# Altium PCB RHT.PcbDoc
Units mm, origin at the board's own origin, x right, y up, seen from the top; angles counter-clockwise.
Board outline 60 x 60 mm, 2 copper layers (Top Layer, Bottom Layer), stack 1.635 mm thick; 64 components, 55 nets, 248 pads, 33 vias.
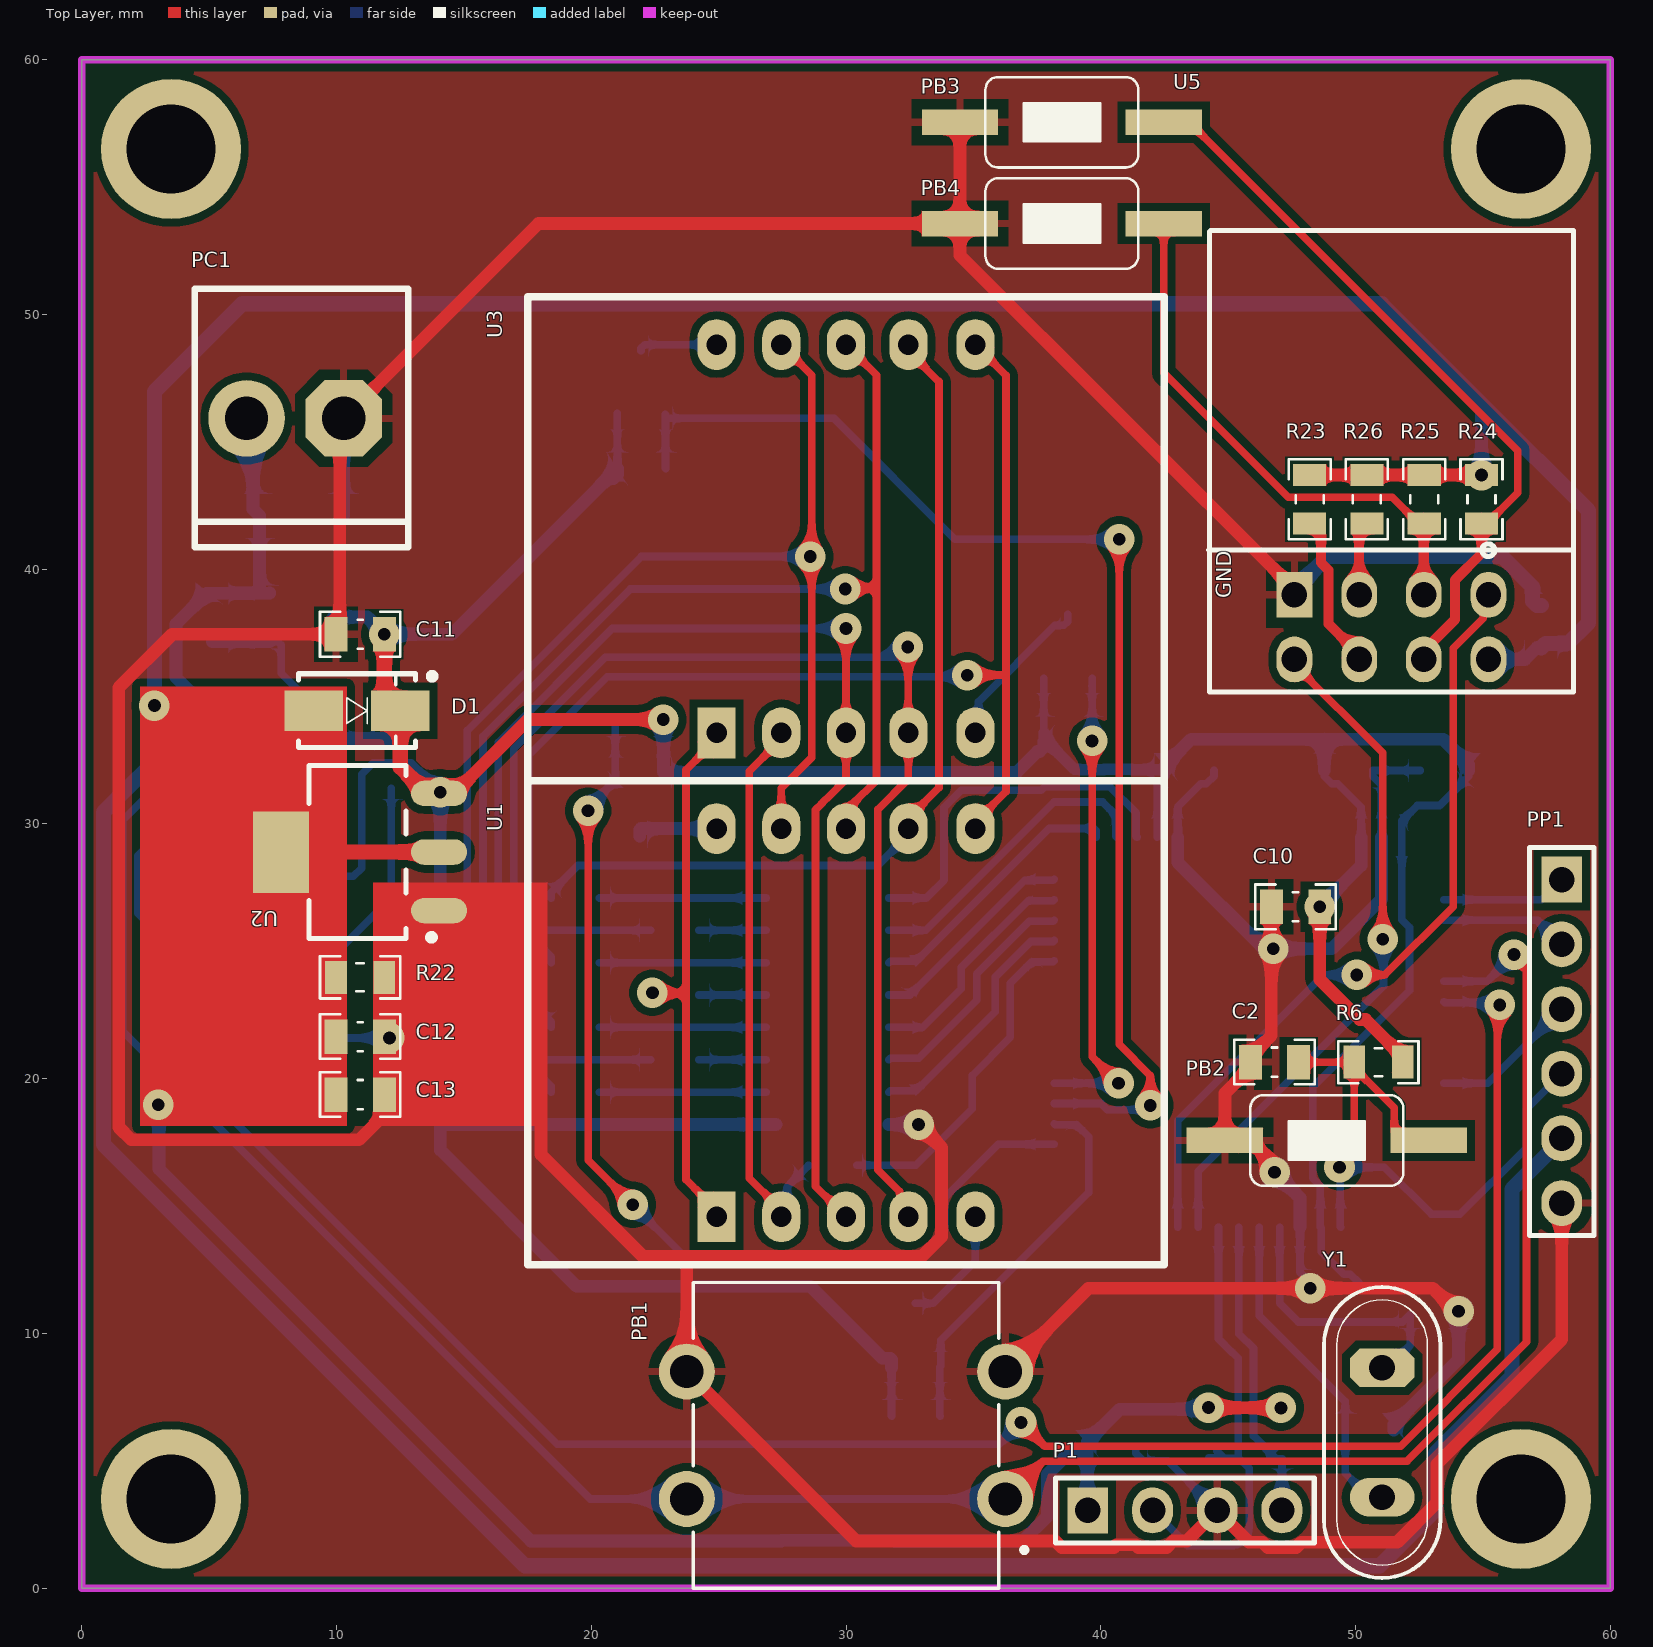
[diagram p0: Top Layer view]
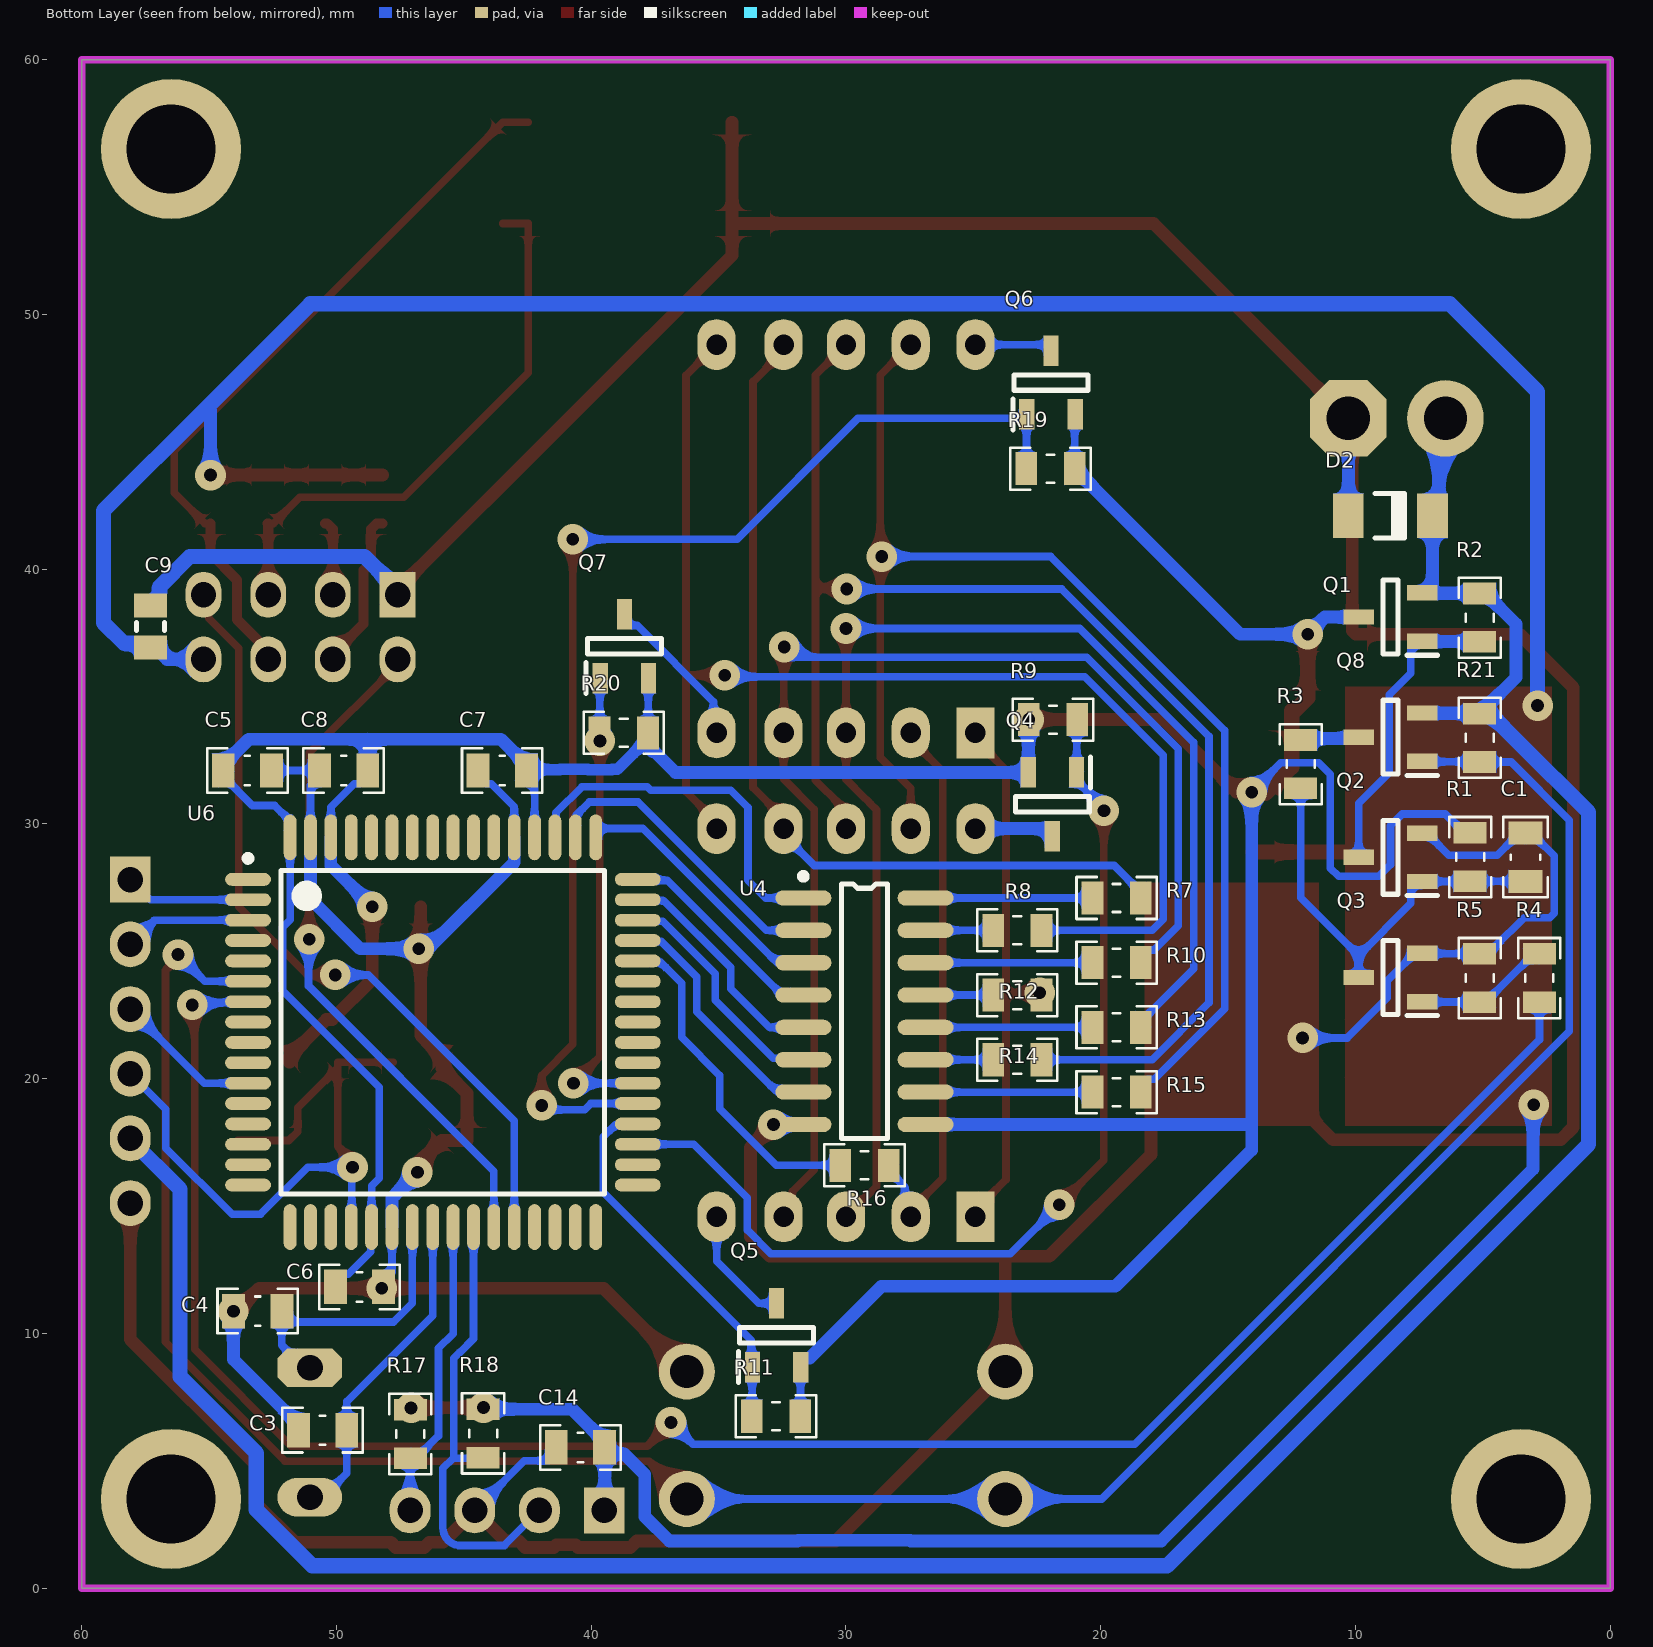
[diagram p1: Bottom Layer view, seen from below]

## Layer stack, top to bottom
Top Solder: solder mask 0.0102, Solder Resist, Dk 3.5
Top Layer: signal copper 0.0175
Dielectric 1: dielectric 1.6, FR-4, Dk 4.8
Bottom Layer: signal copper 0.0175
Bottom Solder: solder mask 0.0102, Solder Resist, Dk 3.5

## Board outline
0,0 60,0 60,60 0,60

## Design rules (kind name [scope] priority, off if disabled: settings)
Clearance [All] p1: gap=0.3 ignorepadtopadclearanceinfootprint=FALSE except(0: Arc-Hole Track-Hole SMDPad-Hole THPad-Hole Via-Hole Fill-Hole Poly-Hole Region-Hole Text-Hole)
ComponentClearance [All] p1: gap=0 collisioncheckmode=3 verticalgap=0.254 showdistances=FALSE
PolygonConnect [All] p1: thpad.connectstyle=Relief thpad.reliefconductorwidth=0.3 thpad.reliefentries=4 thpad.polygonreliefangle="90 Angle" thpad.airgapwidth=0.4 smdpad.connectstyle=Relief smdpad.reliefconductorwidth=0.3 smdpad.reliefentries=4 smdpad.polygonreliefangle="90 Angle" smdpad.airgapwidth=0.4 via.connectstyle=Direct via.reliefconductorwidth=0.254 via.reliefentries=4 via.polygonreliefangle="90 Angle" via.airgapwidth=0.254
RoomDefinition pripherals [InComponentClass('pripherals')] p1 off: confinementstyle=ConfineIn formatcopy=TRUE lockcomponents=FALSE outline 75.3,3.95 107.4,3.95 107.4,32.144 75.3,32.144
RoomDefinition micro [InComponentClass('micro')] p2 off: confinementstyle=ConfineIn formatcopy=TRUE lockcomponents=FALSE outline 74.964,39.776 107.925,39.776 107.925,60.35 74.964,60.35
RoutingVias [All] p1: holewidth=0.5 width=1 viastyle="Through Hole" minholewidth=0.5 minwidth=1 maxholewidth=1 maxwidth=1.5
SolderMaskExpansion [All] p1: expansion=0.102 istentingtop=FALSE
Width [All] p1: maxlimit=1 minlimit=0.3 preferedwidth=0.4
29 further rules are at their usual default settings.

## Classes and differential pairs
component class pripherals: C9 C11 C12 C13 C14 D1 P1 PB3 PB4 Q4 Q5 Q6 Q7 R7 R8 R9 R10 R11 R12 R13 R14 R15 R16 R17 R18 R19 R20 R22 R23 R24 R25 R26 U1 U2 U3 U4 U5
component class micro: C1 C2 C3 C4 C5 C6 C7 C8 C10 D2 PB1 PB2 PC1 PP1 Q1 Q2 Q3 Q8 R1 R2 R3 R4 R5 R6 R21 U6 Y1

## Components (designator, comment, footprint, x,y, rotation, side; value= is the part's Value field where it differs from the comment)
C1 "cap 4.7uF" CAP0805 3.325,28.7 r270 bottom value=4.7uF
C2 "cap 100nF" CAP0805 46.823,20.65 r0 top value=100nF
C3 "cap 22pF" CAP0805 50.55,6.2 r180 bottom value=22pF
C4 "cap 22pF" CAP0805 53.1,10.875 r180 bottom value=22pF
C5 "cap 100nF" CAP0805 53.5,32.1 r0 bottom value=100nF
C6 "cap 100nF" CAP0805 49.1,11.825 r0 bottom value=100nF
C7 "cap 100nF" CAP0805 43.5,32.1 r180 bottom value=100nF
C8 "cap 100nF" CAP0805 49.725,32.1 r180 bottom value=100nF
C9 "cap 100nF" "Cap 805" 57.3,38.575 r270 bottom value=100nF
C10 "cap 10uF" CAP0805 47.65,26.75 r180 top value=10uF
C11 "cap 10uF" CAP0805 10.925,37.45 r180 top value=10uF
C12 "cap 10uF" CAP0805 10.925,21.65 r0 top value=10uF
C13 "cap 100nF" CAP0805 10.925,19.375 r180 top value=100nF
C14 "cap 1uF" CAP0805 40.425,5.525 r0 bottom value=1uF
D1 "uf4007" DIOM4629X24N 10.801,34.45 r0 top
D2 "5.1V" "Diode 1n4148 SMD" 10.275,42.1 r180 bottom
P1 "Header 4" HDR1X4 39.495,3.05 r0 top locked
PB1 "Push-Button-tall" tact-12mm 30,6 r180 top locked
PB2 "Push-Button-tall" tack-sw-3x5x6 48.875,17.575 r0 top
PB3 "Push-Button-tall" tack-sw-3x5x6 38.475,57.55 r0 top
PB4 "Push-Button-tall" tack-sw-3x5x6 38.475,53.575 r0 top
PC1 "Power Connector" "My_ Power_Connector" 14.086,40.845 r180 top
PP1 "Header 6" HDR1X6 58.1,27.815 r270 top
Q1 "NDS356AP" soT95p280x130-3n 8.371,38.125 r0 bottom
Q2 "2N2222A" soT95p280x130-3n 8.371,28.692 r0 bottom
Q3 "2N2222A" soT95p280x130-3n 8.371,23.975 r0 bottom
Q4 "NDS356AP" soT95p280x130-3n 21.9,31.029 r270 bottom
Q5 "NDS356AP" soT95p280x130-3n 32.725,9.675 r90 bottom
Q6 "NDS356AP" soT95p280x130-3n 21.95,47.075 r90 bottom
Q7 "NDS356AP" soT95p280x130-3n 38.7,36.725 r90 bottom
Q8 "NDS356AP" soT95p280x130-3n 8.371,33.408 r0 bottom
R1 "100K" RES0805 5.5,28.7 r270 bottom
R2 "Res 100K" RES0805 5.125,38.1 r270 bottom value=100K
R3 "100K" RES0805 12.15,32.35 r270 bottom
R4 "1K" RES0805 2.775,23.95 r90 bottom
R5 "1K" RES0805 5.125,23.95 r270 bottom
R6 "Res 1K" RES0805 50.902,20.65 r180 top value=1K
R7 "330" RES0805 19.375,27.095 r180 bottom
R8 "330" RES0805 23.275,25.825 r180 bottom
R9 "10K" RES0805 21.875,34.1 r180 bottom
R10 "330" RES0805 19.375,24.555 r180 bottom
R11 "10K" RES0805 32.75,6.75 r0 bottom
R12 "330" RES0805 23.275,23.285 r180 bottom
R13 "330" RES0805 19.375,22.015 r180 bottom
R14 "330" RES0805 23.275,20.745 r180 bottom
R15 "330" RES0805 19.375,19.475 r180 bottom
R16 "330" RES0805 29.275,16.6 r180 bottom
R17 "Res 4.7K" RES0805 47.1,6.05 r270 bottom value=4.7K
R18 "Res 4.7K" RES0805 44.25,6.075 r270 bottom value=4.7K
R19 "10K" RES0805 21.975,43.95 r0 bottom
R20 "10K" RES0805 38.725,33.575 r0 bottom
R21 "Res 100K" RES0805 5.125,33.383 r270 bottom value=100K
R22 "1K" RES0805 10.925,23.975 r180 top
R23 "Res 1K" RES0805 48.2,42.75 r270 top value=1K
R24 "Res 1K" RES0805 54.95,42.75 r270 top value=1K
R25 "Res 1K" RES0805 52.7,42.75 r90 top value=1K
R26 "Res 1K" RES0805 50.45,42.75 r90 top value=1K
U1 "7seg_CA" 7SEG 30,22.2 r0 top locked
U2 "AMS1117-3.3" SOT223 10.825,28.9 r180 top
U3 "7seg_CA" 7SEG 30,41.2 r0 top locked
U4 "ULN2003A" SO16_N 29.275,22.65 r180 bottom
U5 "Header4*2Pin Female" ESP8266-01/ESP-01 51.415,39 r90 top locked
U6 "ATmega128A" TQFP64_N 45.825,21.825 r180 bottom locked
Y1 "8MHz" My_Crystal 51.05,6.11 r270 top locked

## Footprints (in the part's own frame and the unit in brackets; to place one, negate y for a bottom-side part, rotate by r counter-clockwise, add the part's x,y. Pads: shape width x height; smd on the part's side, far side on the other; paste and mask are expansions set on the pad)
7SEG [mm]
  rect 1.5x2 hole 0.8 mask+0.05: 1(-5.08,-7.62)
  oval 1.5x2 hole 0.8 mask+0.05: 2(-2.54,-7.62) 3(0,-7.62) 4(2.45,-7.62) 5(5.08,-7.62) 6(5.08,7.62) 7(2.45,7.62) 8(0,7.62) 9(-2.54,7.62) 10(-5.08,7.62)
  silkscreen extent -12.5,-9.5 12.5,9.5, body extent -12.6,-9.5 12.6,9.5, height 9.1
CAP0805 [mm] "Chip Capacitor, 2-Leads, Body 2/00x1/25mm, IPC Medium Density DESIGNER:ABBAS BASEREH"
  rect 0.9x1.35 smd: 1(-0.95,0) 2(0.95,0)
  silkscreen extent -1.58,-0.87 1.58,0.87, body extent -1.02,-0.65 1.02,0.65, height 0.5
"Cap 805" [mm]
  rect 0.95x1.3 smd: 1(0,0) 2(1.65,0)
  silkscreen extent 0.67,-0.55 0.97,0.55, body extent -0.19,-0.64 1.84,0.63, height 0.65
"Diode 1n4148 SMD" [mm] "Mini MELF SOD-80"
  rect 1.2x1.75 smd: 1(0,0) 2(3.3,0)
  silkscreen extent 1.04,-0.88 2.22,0.87, body extent -0.13,-0.75 3.37,0.75, height 1.55
DIOM4629X24N [mm] "Molded Diode, 2-Leads, Body 4/60x2/90mm, IPC Medium Density-Design:Abbas Basereh"
  rect 2.3x1.6 smd: 1(-1.7,0) 2(1.7,0)
  silkscreen extent -2.3,-1.45 3.08,1.47, body extent -2.5,-1.22 2.5,1.48, height 2.2
ESP8266-01/ESP-01 [mm]
  oval 1.8x1.4 hole 1: 1(0,-3.81) 2(0,-1.27) 3(0,1.27) 5(-2.54,3.81) 6(-2.54,1.27) 7(-2.54,-1.27) 8(-2.54,-3.81)
  rect 1.8x1.4 hole 1: 4(0,3.81)
  silkscreen extent -3.81,-7.15 14.3,7.17, body extent -4.02,-7.15 20.57,7.5, height 10
HDR1X4 [mm] "Connector; Header; 4 Position"
  rect 1.6x1.8 hole 1: 1(0,0)
  oval 1.6x1.8 hole 1: 2(2.54,0) 3(5.08,0) 4(7.62,0)
  silkscreen extent -1.27,-1.27 8.89,1.27
HDR1X6 [mm] "Connector; Header; 6 Position"
  rect 1.8x1.6 hole 1: 1(0,0)
  oval 1.8x1.6 hole 1: 2(2.54,0) 3(5.08,0) 4(7.62,0) 5(10.16,0) 6(12.7,0)
  silkscreen extent -1.27,-1.27 13.97,1.27
"My_ Power_Connector" [mm]
  oct 3x3 hole 1.7: 1(3.81,-5.08)
  round 3 hole 1.7: 2(7.62,-5.08)
  silkscreen extent 1.27,-10.17 9.65,-0.01
My_Crystal [mil]
  oct 60x100 hole 40: 1(-100,0)
  oval 60x100 hole 40: 2(100,0)
  silkscreen extent -225,-90 225,90
RES0805 [mm] "Chip Resistor, 2-Leads, Body 2/00x1/25mm, IPC Medium Density DESIGNER:ABBAS BASEREH"
  rect 0.85x1.3 smd: 1(-0.95,0) 2(0.95,0)
  silkscreen extent -1.58,-0.82 1.58,0.82, body extent -1.02,-0.65 1.02,0.65, height 0.5
SO16_N [mm] "16-Pin Small Outline Integrated Circuit 1.27 mm Pitch, IPC Medium Density - DESIGNER ABBAS BASEREH"
  oval 2.2x0.6 smd: 1(-2.4,4.445) 2(-2.4,3.175) 3(-2.4,1.905) 4(-2.4,0.635) 5(-2.4,-0.635) 6(-2.4,-1.905) 7(-2.4,-3.175) 8(-2.4,-4.445) 9(2.4,-4.445) 10(2.4,-3.175) 11(2.4,-1.905) 12(2.4,-0.635) 13(2.4,0.635) 14(2.4,1.905) 15(2.4,3.175) 16(2.4,4.445)
  silkscreen extent -2.53,-5 0.9,5.42, body extent -3,-4.97 3,4.96, height 1.62
soT95p280x130-3n [mm]
  rect 1.2x0.6 smd: 1(-0.996,0.95) 2(-0.996,-0.95) 3(1.504,0)
  silkscreen extent -1.6,-1.45 0.55,1.5, body extent -1.15,-1.4 1.65,1.5, height 1.3
SOT223 [mm] "SOT223, 4-Leads, Body 6.5x3.5mm, Pitch 2.30mm-Designer Abbas Basereh"
  oval 2.2x1 smd: 1(-3.2,2.3) 2(-3.2,0) 3(-3.2,-2.3)
  rect 2.2x3.2 smd: 4(3,0)
  Top Layer pour cut-out: -1.7,3.556 1.7,3.556 1.7,-3.556 -1.7,-3.556
  silkscreen extent -3.03,-3.4 1.9,3.47, body extent -3.5,-3.25 3.5,3.25, height 1.7
tack-sw-3x5x6 [mm]
  rect 3x1 smd mask+0.05: 1(-4,0) 2(4,0)
  silkscreen extent -3,-1.78 3,1.78, body extent -4,-1.75 4,1.75, height 4.3
tact-12mm [mm]
  round 2.2 hole 1.3: 1(-6.25,2.5) 1(6.25,2.5) 2(-6.25,-2.5) 2(6.25,-2.5)
  silkscreen extent -7.1,-6 6,6, body extent -6.9,-5.98 7.1,6.03, height 8.35
TQFP64_N [mm] "Thin QFP, 64-Leads, Body 14x14mm, Pitch 0.8mm, IPC Medium Density"
  oval 1.8x0.5 smd: 1(-7.65,6) 2(-7.65,5.2) 3(-7.65,4.4) 4(-7.65,3.6) 5(-7.65,2.8) 6(-7.65,2) 7(-7.65,1.2) 8(-7.65,0.4) 9(-7.65,-0.4) 10(-7.65,-1.2) 11(-7.65,-2) 12(-7.65,-2.8) 13(-7.65,-3.6) 14(-7.65,-4.4) 15(-7.65,-5.2) 16(-7.65,-6) 33(7.65,-6) 34(7.65,-5.2) 35(7.65,-4.4) 36(7.65,-3.6) 37(7.65,-2.8) 38(7.65,-2) 39(7.65,-1.2) 40(7.65,-0.4) 41(7.65,0.4) 42(7.65,1.2) 43(7.65,2) 44(7.65,2.8) 45(7.65,3.6) 46(7.65,4.4) 47(7.65,5.2) 48(7.65,6)
  oval 0.5x1.8 smd: 17(-6,-7.65) 18(-5.2,-7.65) 19(-4.4,-7.65) 20(-3.6,-7.65) 21(-2.8,-7.65) 22(-2,-7.65) 23(-1.2,-7.65) 24(-0.4,-7.65) 25(0.4,-7.65) 26(1.2,-7.65) 27(2,-7.65) 28(2.8,-7.65) 29(3.6,-7.65) 30(4.4,-7.65) 31(5.2,-7.65) 32(6,-7.65) 49(6,7.65) 50(5.2,7.65) 51(4.4,7.65) 52(3.6,7.65) 53(2.8,7.65) 54(2,7.65) 55(1.2,7.65) 56(0.4,7.65) 57(-0.4,7.65) 58(-1.2,7.65) 59(-2,7.65) 60(-2.8,7.65) 61(-3.6,7.65) 62(-4.4,7.65) 63(-5.2,7.65) 64(-6,7.65)
  silkscreen extent -7.78,-6.35 6.35,6.95, body extent -8,-8 8,8, height 1.5

## Part data
C1 C2 C3 C4 C5 C6 C7 C8 C13 C14: library part "Cap ceramic", "CAP seramic"
C9: library part Cap, "Capacitor", LatestRevisionDate=17-Jul-2002, LatestRevisionNote="Re-released for DXP Platform.", PackageDescription="Radial Cap, Thru-Hole; 2 Leads; 0.3 in Pin Spacing", PackageReference=RAD-0.3, Published=8-Jun-2000, Publisher="Altium Limited"
C10 C11 C12: library part "Cap Pol1", "CAP seramic", LatestRevisionDate=17-Jul-2002, LatestRevisionNote="Re-released for DXP Platform.", PackageDescription="Polarized Capacitor (Radial); 2 Leads", PackageReference=RB7.6-15, Published=8-Jun-2000, Publisher="Altium Limited"
D1: library part "1n4007 SMD M7", "Standard Rectifiers", Manufacturer="DC COMPONENTS", Data=16-12-2016, Designer="Abbas Basereh", Link=http://www.tme.eu/en/details/m7/smd-universal-diodes/dc-components/, Part. No=M7
D2: library part "D Zener", "Zener Diode 5.1v", LatestRevisionDate=17-Jul-2002, LatestRevisionNote="Re-released for DXP Platform.", PackageDescription="Diode, Thru-Hole; 2 Leads; 0.7 in Pin Spacing", PackageReference=DIODE-0.7, Published=8-Jun-2000, Publisher="Altium Limited"
P1: "Header, 4-Pin", LatestRevisionDate=17-Jul-2002, LatestRevisionNote="Re-released for DXP Platform.", Publisher="Altium Limited"
PC1: "white Power Connector"
PP1: "Header, 6-Pin , female", LatestRevisionDate=17-Jul-2002, LatestRevisionNote="Re-released for DXP Platform.", Publisher="Altium Limited"
Q1 Q4 Q5 Q6 Q7 Q8: library part MOSFET-P, "P-Channel MOSFET SOT23", LatestRevisionDate=17-Jul-2002, LatestRevisionNote="Re-released for DXP Platform.", PackageDescription="TO, Flat Index; 3 In-Line, Axial Leads; Body Dia. 4.6mm; Lead Dia. 0.5 mm (max)", PackageReference=E3, PackageVersion=1995/1996, Published=8-Jun-2000, Publisher="Altium Limited"
Q2 Q3: "Transistor BJT NPN SMD", Manufacturer_Name="Foshan Blue Rocket Elec", Datasheet Link=https://datasheet.lcsc.com/szlcsc/1901291437_Foshan-Blue-Rocket-Elec-2N2222A_C358533.pdf, Height=4.7mm, Manufacturer_Part_Number=2N2222A
R1 R3 R4 R5 R7 R8 R9 R10 R11 R12 R13 R14 R15 R16 R19 R20: library part Resistor, "RES SMD 0603", Part Number=RCS0805100KFKEA
R2 R6 R17 R18 R21 R22 R23 R24 R25 R26: library part Res1, "Resistor", LatestRevisionDate=17-Jul-2002, LatestRevisionNote="Re-released for DXP Platform.", PackageDescription="Axial Device, Thru-Hole; 2 Leads; 0.3 in Pin Spacing", PackageReference=AXIAL-0.3, Published=8-Jun-2000, Publisher="Altium Limited"
U1 U3: library part 7Seg-2digit-ca
U2: library part AMS1117-x.x, "x.x Volt, 800mA Low-Dropout Linear Regulator, 4-pin SOT-223", Data=16-12-2016, Designer="Ali Hafizi"
U4: "SEVEN DARLINGTON ARRAYS", ComponentLink1Description=Datasheet, ComponentLink2URL=http://www.st.com, DatasheetVersion="STMicroelectronics GROUP OF COMPANIES", PackageDescription="16-Pin Small Outline Integrated Circuit 1.27 mm Pitch, IPC High Density", PackageReference=SO16_N, PackageVersion=2017-3-2, Published=2017-3-2, Publisher="Abbas Basereh", Supplier 1=Digi-Key, Supplier 2=Mouser, Supplier Part Number 1=ULN2003A, Supplier Part Number 2=ULN2003A
U5: library part ESP8266-01/ESP-01, "ESP-01 wifi module", Package=None, Availability=Unavailable, MF=AI-Thinker, MP=ESP8266-01/ESP-01, Price=None, SnapEDA_Link=https://www.snapeda.com/parts/ESP8266-01/ESP-01/AI-Thinker/view-part/106413/?ref=snap
U6: "8-bit AVR Microcontroller, 128KB Flash, 4KB EEPROM, 4KB SRAM, 64-pin TQFP, Industrial Grade (-40°C to 85°C)", Supplier Part Number 1=ATMEGA128A-AU-ND, Code_JEDEC=MS-026-AEB, ComponentLink1Description="Manufacturer Link", ComponentLink1URL=http://www.atmel.com/products/avr/default.asp?, ComponentLink2Description="ATmega128A Datasheet", ComponentLink2URL=http://www.atmel.com/dyn/resources/prod_documents/doc8151.pdf, ComponentLink3Description="ATmega128A Summary", ComponentLink3URL=http://www.atmel.com/dyn/resources/prod_documents/8151S.pdf, ComponentLink4Description="Atmel.com Home", ComponentLink4URL=http://www.atmel.com, DatasheetVersion="revE, Feb-2010", PackageDescription="64-Pin Plastic Thin Profile Quad Flat Pack, 14 x 14 x 1.0 mm Body, 0.8 mm Pitch (TQFP)", PackageReference=64A, PackageVersion="revB, Oct-2001", Published=1-Apr-2010, Publisher="Altium Limited", Supplier 1=Digi-Key, Supplier 2=Farnell, Supplier 3=Mouser, Supplier Part Number 2=1773397, Supplier Part Number 3=556-ATMEGA128A-AU
Y1: library part CRYSTAL, "Crystal"

## Free pads (board coordinates)
  round 5.5 hole 3.5: S(3.5,3.5) S(3.5,56.5) S(56.5,3.5) S(56.5,56.5)

## Via types
v1: diameter 1.2, hole 0.5, Top Layer to Bottom Layer, tented both sides, 33 vias

## Nets (pads, with @x,y where several pads share a name; then routed paths per layer and width w, separated by ;. In a path a pad name is that pad's centre, name@x,y a point inside that pad or via, vN(x,y) a via of type N, cw(c..) or ccw(c..) an arc to the next point about the centre after c; other vN are vias at no path point)
+3v3: C9.2 C12.1 C13.2 C14.1 D1.1 P1.1 R17.1 R18.1 R22.2 R23.1 R24.1 R25.2 R26.2 U2.2 U2.4 U5.8 | length 172.1
  Top Layer w0.5: v1(44.232,7.09) 44.239,7.082 47.068,7.082 v1(47.075,7.075) ; R23.1 v1(54.95,43.7)
  Top Layer w0.6: v1@2.813,34.612 2.875,34.55 2.85,34.575 v1(2.85,34.65) ; D1.1 8.751,34.45 7.825,33.524 U2.4 7.825,28.4 9.975,26.25 R22.2 C13.2 ; 9.125,28.9 U2.2
  Bottom Layer w0.5: v1(3,18.975) 3.025,18.95 3.025,16.452 17.627,1.85 27.458,1.85 27.483,1.875 31.875,1.875 31.9,1.85 36.933,1.85 37.9,2.817 37.9,4.457 38.718,5.275 39.275,5.275 C14.1@39.475,5.475 ; P1.1 39.475,3.07 C14.1@39.475,5.475 ; v1(44.232,7.09) 44.167,7.025 40.75,7.025 39.475,5.75 C14.1 C14.1@39.475,5.475 ; v1(47.075,7.075) 47.1,7.05 R17.1 ; v1(54.95,43.7) 54.95,46.22 55.09,46.36 ; U5.8 56.66,36.46 57.125,36.925 C9.2
  Bottom Layer w0.6: v1(2.85,34.65) 2.85,46.975 6.295,50.42 51.03,50.42 55.09,46.36 59.15,42.3 59.15,37.9 58.336,37.086 57.461,37.086 C9.2
+5: C5.2 C6.2 C7.2 C8.2 C10.1 C11.1 D1.2 Q1.3 Q4.2 Q5.2 Q6.2 Q7.2 R1.1 R6.1 R9.1 R11.1 R19.1 R20.1 U2.3 U4.9 U6.21 U6.52 U6.62 U6.64 | length 180.6
  Top Layer w0.5: v1(14.075,31.25) 14.675,31.25 17.525,34.1 v1(22.825,34.1) ; v1(48.6,26.75) 48.6,23.899 50.174,22.324 50.402,22.324 51.852,20.875 R6.1
  Top Layer w0.6: v1(11.875,37.45) 11.875,34.95 12.375,34.45 D1.2 12.501,32.232 U2.3@13.533,31.2
  Bottom Layer w0.3: R1.1 5.725,29.65 6.467,30.392 8.161,30.392 8.625,29.928 8.625,28.405 9.089,27.942 10.661,27.942 10.988,28.268 10.988,31.949 11.439,32.4 12.925,32.4 v1(14.075,31.25) ; R19.1 Q6.2@21.025,46.125 ; Q5.2@31.787,8.667 31.787,6.762 R11.1 ; R20.1@37.762,33.587 Q7.2@37.762,35.717 ; U6.52 42.225,31.55 42.55,31.875 C7.2 ; C8.2 48.775,31.875 49.075,31.575 49.3,31.575 50.225,30.65 U6.62 ; C6.2@50.125,11.775 50.125,12 49.8,12.325 49.55,12.325 48.663,13.212 48.663,14.137 U6.21 48.625,15.79 48.325,16.09 48.325,19.665 52.125,23.465 52.125,25.935 51.825,26.235 51.825,30.125 52.425,30.725 53.3,30.725 54.45,31.875 C5.2
  Bottom Layer w0.45: R20.1 37.775,33.35 38.975,32.15 39.184,32.15 39.196,32.138 40.128,32.138 40.141,32.15 41.227,32.15 41.239,32.138 42.512,32.138 C7.2
  Bottom Layer w0.5: Q1.3 11.2,38.125 v1(11.875,37.45) 14.525,37.45 20.625,43.55 20.85,43.55 21.025,43.725 R19.1 ; v1(14.075,31.25) 14.075,18.1 ; v1(22.825,34.1) 22.838,34.088 22.838,32.038 Q4.2 36.693,32.025 37.518,32.85 37.6,32.85 37.775,33.025 R20.1@37.775,33.25 ; U4.9@27.25,18.2 27.245,18.205 U4.9 14.18,18.205 14.075,18.1 ; Q5.2@31.787,8.667 31.787,8.967 31.725,9.029 31.425,9.029 28.604,11.85 19.425,11.85 14.075,17.2 14.075,18.1 ; C7.2 42.55,32.325 43.55,33.325 48.775,33.325 ; v1(48.6,26.75) 50.225,28.375 U6.62 ; C8.2 48.775,33.325 ; C5.2 54.45,32.325 53.45,33.325 48.775,33.325
A: R7.2 U1.7 U3.7 | length 35.4
  Top Layer w0.3: U1.7 32.45,30.225 33.65,31.425 33.65,47.37 32.45,48.57 U3.7
  Bottom Layer w0.3: R7.2 18.425,27.32 19.475,28.37 31.25,28.37 32.45,29.57 U1.7
B: R8.2 U1.6 U3.6 | length 51.4
  Top Layer w0.3: v1(34.758,35.842) 34.765,35.85 36.28,35.85 ; U1.6 35.08,30.07 36.28,31.27 36.28,35.7 36.28,35.85 ; U3.6 36.28,47.62 36.28,35.85
  Bottom Layer w0.3: R8.2 17.984,25.825 17.55,26.259 17.55,32.7 20.625,35.775 34.69,35.775 v1(34.758,35.842)
C: R10.2 U1.4 U3.4 | length 49.8
  Top Layer w0.3: v1(32.425,36.95) 32.437,36.938 32.437,33.593 U3.4 32.45,31.767 31.25,30.567 31.25,16.425 32.099,15.576 32.099,15.506 32.45,15.155 U1.4
  Bottom Layer w0.3: R10.2 18.425,24.78 18.15,25.055 17.905,25.055 16.95,26.01 16.95,32.949 20.551,36.55 32.249,36.55 32.425,36.726 v1(32.425,36.95)
D: R12.2 U1.1 U3.1 | length 21.4
  Top Layer w0.3: v1(22.4,23.375) 22.425,23.35 23.72,23.35 ; U1.1 24.32,15.18 24.32,15.43 23.72,16.03 23.72,23.35 ; U3.1 24.92,33.33 23.72,32.13 23.72,23.35
  Bottom Layer w0.3: R12.2 22.325,23.3 v1(22.4,23.375)
DP: R16.2 U1.2 U3.2 | length 22.5
  Top Layer w0.3: U1.2 27.46,14.84 26.2,16.1 26.2,32.07 27.46,33.33 U3.2
  Bottom Layer w0.3: U1.2 27.69,14.81 27.69,15.765 28.025,16.1 28.05,16.1 28.525,16.575 R16.2@28.525,16.6
E: R13.2 U1.3 U3.3 | length 51.6
  Top Layer w0.3: U1.3 28.8,15.78 28.8,30.55 29.04,30.79 cw(c30,30.07) 29.28,31.03 30,31.75 U3.3 v1(30,37.675)
  Bottom Layer w0.3: R13.2 18.425,22.24 16.35,24.315 16.35,33.197 20.828,37.675 v1(30,37.675)
ESP_RST: PB3.2 R24.2 U5.7 | length 29.1
  Top Layer w0.3: PB3.2 43.475,57.55 56.375,44.65 56.375,43 55.175,41.8 R24.2
  Top Layer w0.4: U5.7 52.685,36.807 53.913,38.035 53.913,39.585 54.95,40.622 R24.2
F: R14.2 U1.8 U3.8 | length 55.8
  Top Layer w0.3: v1(29.975,39.225) 30.025,39.275 31.2,39.275 ; U1.8 30.23,30.05 30.23,30.755 31.2,31.725 31.2,39.275 ; U3.8 31.2,47.62 31.2,39.275
  Bottom Layer w0.3: R14.2 17.984,20.745 15.75,22.979 15.75,33.446 21.529,39.225 v1(29.975,39.225)
G: R15.2 U1.9 U3.9 | length 52
  Top Layer w0.3: U1.9 27.46,31.41 28.66,32.61 28.66,47.62 U3.9
  Bottom Layer w0.3: R15.2 18.425,19.7 18.15,19.975 17.905,19.975 15.125,22.755 15.125,33.669 21.956,40.5 v1(28.6,40.5)
GND: C1.1 C2.1 C3.1 C4.1 C5.1 C6.1 C7.1 C8.1 C9.1 C10.2 C11.2 C12.2 C13.1 C14.2 D2.1 P1.3 PB1.2 PB2.1 PB3.1 PB4.1 PC1.1 PP1.6 Q2.2 Q3.2 R5.1 R22.1 U2.1 U4.8 U5.4 U6.22 U6.53 U6.63 | length 283.7
  Top Layer w0.3: C2.1@45.873,20.425 C2.1 ; v1@46.653,16.797 46.653,16.497 v1(46.825,16.325)
  Top Layer w0.5: 13.575,19.25 12.525,19.25 10.875,17.6 1.943,17.6 1.45,18.093 1.45,35.353 3.547,37.45 C11.2 10.125,37.6 10.125,45.775 PC1.1 17.926,53.575 PB4.1 ; 17.55,18.525 17.9,18.525 18.025,18.4 18.025,17.024 22.019,13.03 23.85,13.03 ; v1(32.85,18.2) 33.75,17.3 33.75,13.792 32.988,13.03 23.85,13.03 ; PB3.1 PB4.1 ; PB1.2@36.25,8.5 39.525,11.775 v1(48.225,11.775) 53.041,11.775 53.941,10.875 v1(54.05,10.875) ; C2.1@45.873,20.425 44.875,19.427 PB2.1 45.875,17.575 46.691,16.759 46.691,16.459 v1(46.825,16.325) ; C2.1 45.873,20.875 46.7,21.702 C10.2 ; U5.4 47.605,39.2 40.817,45.988 40.812,45.988 34.475,52.325 PB4.1 ; PP1.6 58.1,9.767 53.2,4.867 53.2,3.357 51.643,1.8 47.874,1.8 47.674,1.6 46.556,1.6 46.356,1.8 45.825,1.8 P1.3 43.375,1.85 42.844,1.85 42.594,1.6 41.476,1.6 41.376,1.7 40.623,1.7 40.523,1.6 38.467,1.6 38.217,1.85 30.4,1.85 23.75,8.5 23.75,12.93 23.85,13.03
  Bottom Layer w0.3: Q2.2 7.075,29.642 6.925,29.492 6.925,29.364 6.336,28.775 4.425,28.775 3.55,29.65 C1.1 3.1,29.65 2.2,28.75 2.2,26.501 2.376,26.325 3.375,26.325 4.525,25.175 4.85,25.175 R5.1 5.137,24.913 7.362,24.913 Q3.2 7.675,24.925 8.75,23.85 8.75,23.175 10.325,21.6 v1(12.075,21.6) ; C14.2 41.375,5.3 41.675,5 42.625,5 P1.3 ; U6.53 43.025,30.675 43.925,31.575 44.15,31.575 44.45,31.875 C7.1 ; U6.22 47.825,12.4 48.225,12 C6.1@48.225,11.825 ; C6.1 48.175,11.825 v1(48.225,11.775) ; U6.63 51.025,31.525 50.675,31.875 C8.1 C5.1
  Bottom Layer w0.5: D2.1 PC1.1@10.275,45.925 ; U4.8 31.677,18.203 32.847,18.203 v1(32.85,18.2) ; U6.53 43.025,28.494 46.419,25.1 v1(46.775,25.1) 49.074,25.1 51.025,27.051 U6.63 ; v1(46.825,16.325) 47.825,15.325 47.825,14.825 U6.22 ; C3.1 51.5,6.425 54.05,8.975 v1(54.05,10.875)
  Bottom Layer w0.6: U5.4 47.605,39.2 48.905,40.5 55.763,40.5 56.95,39.313 56.95,38.75 57.125,38.575 C9.1
IO0: PB4.2 R25.1 U5.2 | length 22.3
  Top Layer w0.3: PB4.2@43.475,53.575 PB4.2 42.475,47.714 47.364,42.825 51.45,42.825 52.475,41.8 R25.1
  Top Layer w0.4: U5.2 52.685,41.785 R25.1
IO2: R26.1 U5.3 | length 3
  Top Layer w0.4: U5.3 50.145,41.575 50.37,41.8 R26.1
MISO: PP1.2 U6.3 | length 5
  Bottom Layer w0.3: U6.3 57.15,26.225 PP1.2
MOSI: PP1.1 U6.2 | length 5
  Bottom Layer w0.3: U6.2 57.31,27.025 PP1.1
NetC1_2: C1.2 Q2.1 Q3.3 R1.2 R3.2 | length 16.5
  Bottom Layer w0.3: C1.2 R1.2 5.504,27.746 7.371,27.746 Q2.1 7.675,27.742 7.825,27.592 7.825,26.883 9.875,24.833 ; Q3.3 9.875,24.833 ; R3.2 12.15,27.108 9.875,24.833
NetC3_2: C3.2 U6.24 Y1.2 | length 12.9
  Bottom Layer w0.3: U6.24 46.225,10.7 49.6,7.325 C3.2 49.6,4.512 50.542,3.57 Y1.2
NetC4_2: C4.2 U6.23 Y1.1 | length 11.2
  Bottom Layer w0.3: U6.23 47.025,11.189 47.764,10.45 51.85,10.45 52.15,10.75 52.15,9.535 51.265,8.65 Y1.1
NetQ1_2: Q1.1 Q2.3 R2.2 | length 12
  Bottom Layer w0.3: Q1.1 7.675,37.175 7.825,37.025 7.825,35.925 8.675,35.075 8.675,32.008 9.875,30.808 Q2.3
  Bottom Layer w0.5: R2.2 5.138,37.163 7.362,37.163 Q1.1
NetQ3_2: Q3.1 R4.2 R5.2 | length 5.4
  Bottom Layer w0.3: R4.2 3.05,24.625 3.275,24.625 4.9,23 R5.2 5.138,23.013 7.362,23.013 Q3.1
NetQ4_1: Q4.3 U1.10 | length 3.3
  Bottom Layer w0.5: Q4.3 21.9,29.77 21.95,29.82 U1.10
NetQ4_2: Q4.1 R9.2 U6.35 | length 40.1
  Top Layer w0.3: v1(19.875,30.525) 19.875,16.8 v1(21.625,15.05)
  Bottom Layer w0.3: v1(19.875,30.525) 19.875,30.65 20.95,31.725 Q4.1 20.938,32.038 20.938,34.087 R9.2 ; v1(21.625,15.05) 23.545,13.13 32.947,13.13 33.88,14.063 33.88,15.327 35.978,17.425 U6.35
NetQ5_1: Q5.3 U1.5 | length 4.8
  Bottom Layer w0.3: Q5.3 33.429,11.179 35.08,12.83 U1.5
NetQ5_2: Q5.1 R11.2 U6.36 | length 15
  Bottom Layer w0.3: R11.2 33.687,6.763 33.687,8.666 Q5.1 33.719,8.723 33.719,9.729 39.525,15.535 39.525,17.715 39.053,18.187 38.213,18.187 U6.36
NetQ6_1: Q6.3 U3.10 | length 3.1
  Bottom Layer w0.3: Q6.3 21.95,48.67 22.1,48.82 U3.10
NetQ6_2: Q6.1 R19.2 U6.37 | length 48.5
  Top Layer w0.3: v1(40.725,41.175) 40.725,21.35 41.95,20.125 v1(41.95,18.95)
  Bottom Layer w0.3: Q6.1 22.912,46.066 22.912,43.963 R19.2 ; Q6.1@23.05,45.925 29.528,45.925 34.278,41.175 v1(40.725,41.175) ; U6.37 40.015,19.025 40.265,18.775 41.135,18.775 41.138,18.778 41.778,18.778 v1(41.95,18.95)
NetQ7_1: Q7.3 U3.5 | length 6.4
  Bottom Layer w0.3: U3.5 35.204,33.704 35.204,34.804 38.196,37.796 38.55,37.796 38.7,37.946 Q7.3
NetQ7_2: Q7.1 R20.2 U6.38 | length 18.6
  Top Layer w0.3: v1(39.662,33.263) 39.662,20.863 v1(40.7,19.825)
  Bottom Layer w0.3: U6.38 v1(40.7,19.825) ; Q7.1@39.65,35.404 Q7.1@39.662,35.391 ; v1(39.662,33.263) R20.2@39.675,33.25 ; R20.2@39.662,33.588 Q7.1@39.662,35.716
NetQ8_1: Q8.3 R3.1 | length 2.3
  Bottom Layer w0.5: Q8.3 9.925,33.358 12.092,33.358 R3.1
NetR7_1: R7.1 U4.16 | length 6.5
  Bottom Layer w0.3: R7.1 U4.16
NetR8_1: R8.1 U4.15 | length 2.6
  Bottom Layer w0.3: R8.1 U4.15
NetR10_1: R10.1 U4.14 | length 6.5
  Bottom Layer w0.3: R10.1 U4.14
NetR12_1: R12.1 U4.13 | length 2.6
  Bottom Layer w0.3: R12.1 U4.13
NetR13_1: R13.1 U4.12 | length 6.5
  Bottom Layer w0.3: R13.1 U4.12
NetR14_1: R14.1 U4.11 | length 2.6
  Bottom Layer w0.3: R14.1 U4.11
NetR15_1: R15.1 U4.10 | length 6.5
  Bottom Layer w0.3: R15.1 U4.10
NetR16_1: R16.1 U6.44 | length 13.1
  Bottom Layer w0.3: R16.1@30.425,16.6 32.735,16.6 34.95,18.815 34.95,20.125 36.455,21.63 36.455,23.745 37.297,24.587 38.137,24.587 U6.44
NetR23_2: R23.2 U5.6 | length 6.3
  Top Layer w0.4: R23.2 48.425,41.8 48.65,41.575 48.65,40.262 48.945,39.967 48.945,37.86 50.145,36.66 U5.6
NetU4_1: U4.1 U6.51 | length 14.6
  Bottom Layer w0.3: U4.1 33.145,27.095 33.85,27.8 33.85,30.65 34.525,31.325 37.662,31.325 37.799,31.463 40.362,31.463 41.387,30.438 41.387,29.513 U6.51
NetU4_2: U4.2 U6.50 | length 12.1
  Bottom Layer w0.3: U4.2 33.126,25.825 38.164,30.863 40.077,30.863 40.587,30.353 40.587,29.513 U6.50
NetU4_3: U4.3 U6.49 | length 10.6
  Bottom Layer w0.3: U4.3 31.732,24.612 32.762,24.612 37.975,29.825 39.733,29.825 39.825,29.733 U6.49
NetU4_4: U4.4 U6.48 | length 8.4
  Bottom Layer w0.3: U4.4 32.51,23.285 37.012,27.787 38.137,27.787 U6.48
NetU4_5: U4.5 U6.47 | length 9.1
  Bottom Layer w0.3: U4.5 33.015,22.015 34.531,23.531 34.531,24.367 37.151,26.987 38.137,26.987 U6.47
NetU4_6: U4.6 U6.46 | length 9.4
  Bottom Layer w0.3: U4.6 31.732,20.802 32.852,20.802 35.131,23.081 35.131,24.118 37.2,26.187 38.137,26.187 U6.46
NetU4_7: U4.7 U6.45 | length 9.8
  Bottom Layer w0.3: U4.7 31.732,19.532 32.757,19.532 35.855,22.63 35.855,23.994 37.248,25.387 38.137,25.387 U6.45
NetU5_1: U5.1 U6.28 | length 31.3
  Top Layer w0.3: v1(50.05,24.075) 51.16,24.075 53.835,26.75 53.835,36.896 55.015,38.076 55.015,38.79 U5.1
  Bottom Layer w0.3: U6.28 43.025,18.35 48.75,24.075 v1(50.05,24.075)
NetU5_5: U5.5 U6.27 | length 26.7
  Top Layer w0.3: U5.5 47.605,36.26 51.075,32.79 v1(51.075,25.475)
  Bottom Layer w0.3: U6.27 43.825,16.365 51.1,23.64 51.1,25.45 v1(51.075,25.475)
OFF: R4.1 U6.7 | length 79
  Top Layer w0.3: v1(36.87,6.505) 37.8,5.575 51.775,5.575 55.575,9.375 55.575,22.804 v1(55.669,22.899)
  Bottom Layer w0.3: R4.1 2.775,21.533 18.658,5.65 36.015,5.65 v1(36.87,6.505) ; U6.7 53.513,22.987 55.581,22.987 v1(55.669,22.899)
ON: PB1.1 Q8.1 R21.2 U6.6 | length 98.9
  Top Layer w0.3: PB1.1@36.25,3.5 37.725,4.975 52.024,4.975 56.719,9.671 56.719,24.249 56.225,24.743 v1(56.225,24.875)
  Bottom Layer w0.3: Q8.1 7.362,32.446 5.138,32.446 R21.2 3.88,32.433 1.6,30.153 1.6,21.86 19.96,3.5 23.75,3.5 PB1.1@36.25,3.5 ; U6.6 55.175,23.825 v1(56.225,24.875)
Reset: C2.2 PB2.2 PP1.4 R6.2 U6.20 | length 27.2
  Top Layer w0.3: C2.2 R6.2 R6.2@49.952,20.425 ; v1(49.375,16.525) 49.375,16.769 49.952,17.345 R6.2@49.952,20.425 ; PB2.2@53.875,17.575 PB2.2 51.875,17.575 51.525,17.925 51.525,18.852 R6.2@49.952,20.425
  Bottom Layer w0.3: U6.20 49.4,14.2 49.4,16.5 v1(49.375,16.525) 51.135,16.525 52.988,14.672 54.097,14.672 56.7,17.275 56.7,17.671 cw(c60.498,17.716) 56.7,17.761 56.7,18.795 PP1.4
SCK: PP1.3 U6.11 | length 5.8
  Bottom Layer w0.3: U6.11 55.19,19.825 PP1.3
SCL: P1.4 R17.2 U6.25 | length 12
  Bottom Layer w0.3: U6.25 45.425,9.991 46,9.416 46,5.975 46.89,5.085 47.115,5.085 P1.4
SDA: P1.2 R18.2 U6.26 | length 18.8
  Bottom Layer w0.3: P1.2 43.41,1.675 45.19,1.675 ccw(c45.189,1.975) 45.236,1.679 ccw(c45.124,2.371) 45.825,2.371 45.825,4.7 45.425,5.1 45.4,5.1 ; R18.2 44.825,5.125 R18.2@44.567,5.383 ; R18.2@44.55,5.1 R18.2@44.8,5.1 ; U6.26 44.625,9.789 45.164,9.25 45.175,9.25 45.4,9.025 45.4,5.1 ; 44.9,5.1 45.4,5.1
VIN: D2.2 PC1.2 PP1.5 Q1.2 Q8.2 R2.1 R21.1 | length 113
  Bottom Layer w0.5: R21.1@4.9,34.333 4.725,34.508 4.725,34.733 3.7,35.758 3.7,37.85 4.9,39.05 R2.1 5.137,39.063 6.975,39.063 7.362,39.063 Q1.2 ; R21.1 5.137,34.346 7.362,34.346 Q8.2 ; PC1.2 6.72,45.671 6.72,42.355 D2.2 Q1.2@6.975,39.175
  Bottom Layer w0.6: R21.1 4.72,34.333 3.57,33.183 0.85,30.464 0.85,17.425 17.4,0.875 50.95,0.875 53.15,3.075 53.15,5.3 56.15,8.3 56.15,15.664 58.1,17.614 PP1.5
pads on no net: U6.1 U6.4 U6.5 U6.8 U6.9 U6.10 U6.12 U6.13 U6.14 U6.15 U6.16 U6.17 U6.18 U6.19 U6.29 U6.30 U6.31 U6.32 U6.33 U6.34 U6.39 U6.40 U6.41 U6.42 U6.43 U6.54 U6.55 U6.56 U6.57 U6.58 U6.59 U6.60 U6.61

## Polygon pours and split planes (outlines as drawn)
GND on Top Layer "GND_L01_P000" (solid, remove dead copper, pour order 0): 0,0 0,60 60,60 60,0

## Keep-outs
Keep-Out Layer:
  the board outline again, w0.3

## Other copper
Top Layer:
  rectangle net GND: 11.425,18.15 18.275,27.7
  rectangle net +3v3: 2.275,18.15 10.4,35.4
  pour cut-out: 11.425,27.7 11.475,27.65 11.475,18.15 9.675,18.15 10.25,18.725 10.25,27.7

## Text inside footprints (layer, text, board x,y; h text height)
U5: Top Overlay "GND" at 45.319,38.869 h1 r90